# Altium PCB TSAL 2024-25.PcbDoc
Units mm, origin at the board's own origin, x right, y up, seen from the top; angles counter-clockwise.
Board outline 81.54 x 30.95 mm, 2 copper layers (Top Layer, Bottom Layer); 18 components, 10 nets, 50 pads, 1274 vias.
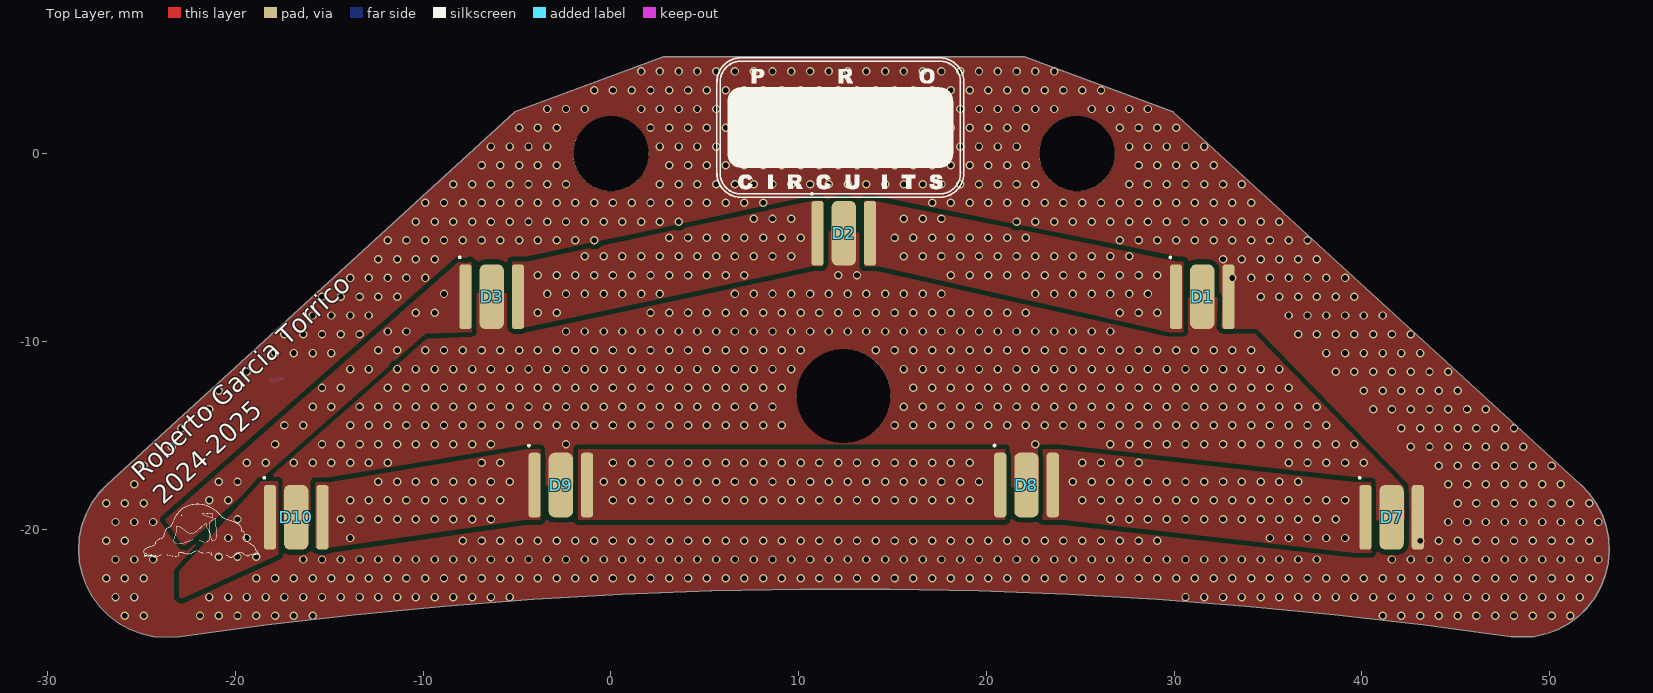
[diagram p0: Top Layer view]
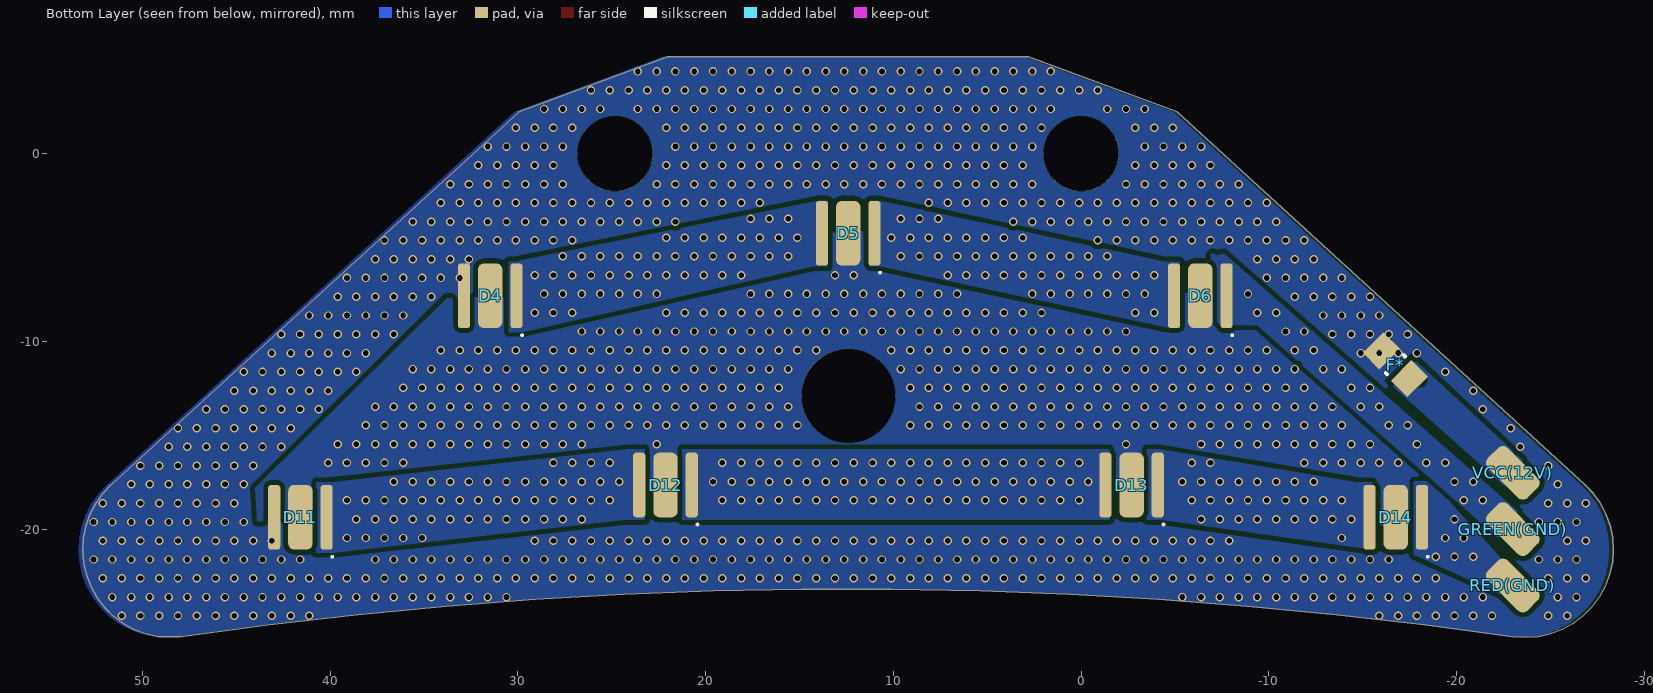
[diagram p1: Bottom Layer view, seen from below]

## Layer stack, top to bottom
Top Solder: solder mask 0.0102, Solder Resist, Dk 3.5
Top Layer: signal copper 0.0356
Dielectric 1: dielectric 0.32, FR-4, Dk 4.8
Bottom Layer: signal copper 0.0356
Bottom Solder: solder mask 0.0102, Solder Resist, Dk 3.5

## Board outline
-5.117,2.227 -26.833,-17.623 -27.28,-18.093 -27.658,-18.619 -27.96,-19.193 -28.18,-19.803 -28.313,-20.438 -28.358,-21.084 -28.31,-21.751 -28.168,-22.405 -27.934,-23.032 -27.614,-23.619 -27.213,-24.154 -26.74,-24.627 -26.205,-25.028 -25.618,-25.349 -24.991,-25.583 -24.338,-25.725 -23.671,-25.773 -23.003,-25.726 -18.298,-25.097 -13.582,-24.557 -8.856,-24.107 -4.123,-23.747 0.617,-23.476 5.361,-23.296 10.107,-23.206 14.854,-23.206 19.6,-23.296 24.344,-23.476 29.084,-23.747 33.817,-24.107 38.543,-24.557 43.259,-25.097 47.965,-25.726 49.164,-25.726 49.81,-25.586 50.43,-25.357 51.012,-25.042 51.544,-24.649 52.015,-24.185 52.417,-23.659 52.74,-23.082 52.979,-22.466 53.129,-21.822 53.186,-21.163 53.151,-20.502 53.023,-19.854 52.804,-19.229 52.501,-18.642 52.117,-18.103 51.662,-17.623 29.947,2.227 22.031,5.174 2.798,5.174

## Design rules (kind name [scope] priority, off if disabled: settings)
Clearance [All] p1: gap=0.254 ignorepadtopadclearanceinfootprint=FALSE except(0: Arc-Hole Track-Hole SMDPad-Hole THPad-Hole Via-Hole Fill-Hole Poly-Hole Region-Hole Text-Hole)
PlaneConnect [All] p1: planeconnectstyle=Direct reliefexpansion=0.508 reliefentries=4 reliefconductorwidth=0.254 reliefairgap=0.254
PolygonConnect [All] p1: connectstyle=Relief reliefconductorwidth=0.254 reliefentries=4 polygonreliefangle="90 Angle" airgapwidth=0.254
RoutingVias [All] p1: holewidth=0.711 width=1.27 viastyle="Through Hole" minholewidth=0.711 minwidth=1.27 maxholewidth=0.711 maxwidth=1.27
SolderMaskExpansion [All] p1: expansion=0.102 istentingtop=FALSE
SupplyNets "Schematic Supply Nets" [InNet('+12')] p1: voltage=0.000
Width [All] p1: maxlimit=1 minlimit=0.254 preferedwidth=0.5
29 further rules are at their usual default settings.

## Components (designator, comment, footprint, x,y, rotation, side; value= is the part's Value field where it differs from the comment)
D1 "" "LED_3535_WE - duplicate" 31.503,-7.625 r0 top
D2 "" "LED_3535_WE - duplicate" 12.41,-4.24 r0 top
D3 "" "LED_3535_WE - duplicate" -6.35,-7.62 r0 top
D4 "LEDGS-3535-85_DUPLICATE" "LED_3535_WE - duplicate" 31.48,-7.57 r0 bottom
D5 "LEDGS-3535-85_DUPLICATE" "LED_3535_WE - duplicate" 12.41,-4.24 r0 bottom
D6 "LEDGS-3535-85_DUPLICATE" "LED_3535_WE - duplicate" -6.35,-7.57 r0 bottom
D7 "LEDRS-3535-55_DUPLICATE" "LED_3535_WE - duplicate" 41.59,-19.37 r0 top
D8 "LEDRS-3535-55_DUPLICATE" "LED_3535_WE - duplicate" 22.14,-17.65 r0 top
D9 "LEDRS-3535-55_DUPLICATE" "LED_3535_WE - duplicate" -2.667,-17.653 r0 top
D10 "LEDRS-3535-55_DUPLICATE" "LED_3535_WE - duplicate" -16.764,-19.37 r0 top
D11 "LEDRS-3535-55_DUPLICATE" "LED_3535_WE - duplicate" 41.59,-19.37 r0 bottom
D12 "LEDRS-3535-55_DUPLICATE" "LED_3535_WE - duplicate" 22.14,-17.65 r0 bottom
D13 "LEDRS-3535-55_DUPLICATE" "LED_3535_WE - duplicate" -2.69,-17.65 r0 bottom
D14 "LEDRS-3535-55_DUPLICATE" "LED_3535_WE - duplicate" -16.76,-19.37 r0 bottom
F* "MFU0805FF00750P500" 0805 -16.742,-11.242 r315 bottom
GREEN(GND) "Green Led" TestPoint#1 -20.828,10.922 r90 bottom locked
RED(GND) "Red Led" TestPoint#2 -25.908,1.27 r180 bottom locked
VCC(12V) "Vcc 12V" TestPoint#3 -17.399,29.21 r90 bottom locked

## Footprints (in the part's own frame and the unit in brackets; to place one, negate y for a bottom-side part, rotate by r counter-clockwise, add the part's x,y. Pads: shape width x height; smd on the part's side, far side on the other; paste and mask are expansions set on the pad)
0805 [mm] "Chip Resistor, 2-Leads, Body 2,60x1,50mm, IPC Medium Density"
  rect 1.55x1.25 smd: 1(0,-1.05) 2(0,1.05)
  silkscreen extent -0.68,-0.05 0.68,0.05, body extent -0.75,-1.3 0.75,1.3, height 0.6
"LED_3535_WE - duplicate" [mm] "DFN, 2-Leads, Body 3,25x3,25mm, Pitch 2,28mm, IPC Medium Density"
  rrect50% 1.3x3.45 smd: 17(0,0)
  rrect50% 0.65x3.45 smd: A(1.397,0) K(-1.397,0)
  silkscreen extent -1.75,2.05 -1.65,2.15, body extent -1.73,-1.73 1.73,1.73, height 2.1
TestPoint#1 [mm]
  rrect50% 1.5x3 smd rot 135: 1(-30.922,-2.172)
TestPoint#2 [mm]
  rrect50% 1.5x3 smd rot 45: 1(-2.908,-24.27)
TestPoint#3 [mm]
  rrect50% 1.5x3 smd rot 135: 1(-46.21,-5.601)

## Part data
D1 D2 D3 D4 D5 D6: library part CMP-00150-1, "High Brightness LED, WL-SMDC Series, 525 nm, Green, 85 lm, 350 mA", Case/Package=SMD/SMT, Color=Green, Forward Current=1A, Forward Voltage=3.4V, Manufacturer="Wurth Electronics", Manufacturer Part Number=150353GS74500, Test Current=350mA, Test Temperature=25°C, Thermal Resistance of Package=8°C/W, .Creator=GP, ComponentLink1Description=http://www.farnell.com/datasheets/1886832.pdf?src-supplier=Farnell, ComponentLink1URL=http://www.farnell.com/datasheets/1886832.pdf?src-supplier=Farnell, ComponentLink2Description=http://www.farnell.com/datasheets/1886832.pdf?src-supplier=Element14, ComponentLink2URL=http://www.farnell.com/datasheets/1886832.pdf?src-supplier=Element14, ComponentLink3Description="Where buy it", ComponentLink3URL=https://www.we-online.com/catalog/en/WL-SMDC?sq=150353rs74500&sp=https%3A%2F%2Fwww.we-online.com%2Fweb%2Fen%2Fwuerth_elektronik%2Fsearchpage.php%3Fsearch%3D150353rs74500#150353GS74500, Design Item ID=LEDGS-3535-85_DUPLICATE, Luminous Flux=85lm, Max Current Rating=1A, Mount="Surface Mount", Packaging="Cut Tape", Pricing 1="1=3,24000, 50=2,85700, 100=2,34700, 500=2,08000 (USD)", REACH SVHC=Unknown, RoHS=Yes, RoHS Compliant=Yes, Source=Semiconductor.SchLib, Viewing Angle=125°, Wavelength=525nm
D7 D8 D9 D10 D11 D12 D13 D14: library part CMP-00152-1, "High Brightness Led, Wl-Smdc Series, 625 Nm, Red, 55 Lm, 350 Ma", Case/Package=SMD/SMT, Color=Red, Forward Current=700mA, Forward Voltage=2.2V, Manufacturer="Wurth Electronics", Manufacturer Part Number=150353RS74500, Test Current=350mA, Test Temperature=25°C, Thermal Resistance of Package=10°C/W, .Creator=GP, ComponentLink1Description=http://www.farnell.com/datasheets/1886833.pdf?src-supplier=Farnell, ComponentLink1URL=http://www.farnell.com/datasheets/1886833.pdf?src-supplier=Farnell, ComponentLink2Description=http://www.farnell.com/datasheets/1886833.pdf?src-supplier=Element14, ComponentLink2URL=http://www.farnell.com/datasheets/1886833.pdf?src-supplier=Element14, ComponentLink3Description="Where buy it", ComponentLink3URL=https://www.we-online.com/catalog/en/WL-SMDC?sq=150353rs74500&sp=https%3A%2F%2Fwww.we-online.com%2Fweb%2Fen%2Fwuerth_elektronik%2Fsearchpage.php%3Fsearch%3D150353rs74500#150353RS74500, Design Item ID=LEDRS-3535-55_DUPLICATE, Luminous Flux=55lm, Max Current Rating=700mA, Mount="Surface Mount", Packaging="Cut Tape", Pricing 1="5=1,40500 (USD)", REACH SVHC=Unknown, RoHS=Yes, RoHS Compliant=Yes, Source=Semiconductor.SchLib, Stock 1=1, Viewing Angle=125°, Wavelength=625nm
F*: library part CMP-005-00000-3, "Electric Fuse, Very Fast Blow, 0.75A, 32VDC, 50A (IR), Surface Mount", Current Rating=750mA, Max Operating Temperature=125°C, Min Operating Temperature=-55°C, Mounting Technology="Surface Mount", RoHS Compliant=Yes
GREEN(GND) RED(GND) VCC(12V): library part CMP-00042-2, "Test Point 1x1 mm", .Creator=GP, .PCBcheck=GP, .SCHcheck=GP, Category=TestPoint, Design Item ID=TestPoint, Source=e-Tech_Racing.SchLib

## Free pads (board coordinates)
  round 4 hole 4: 1(0,0) 1(24.829,0)
  round 5 hole 5: 1(12.4,-12.9)

## Via types
v1: diameter 0.45, hole 0.3, Top Layer to Bottom Layer, tented both sides, 1274 vias

## Nets (pads, with @x,y where several pads share a name; then routed paths per layer and width w, separated by ;. In a path a pad name is that pad's centre, name@x,y a point inside that pad or via, vN(x,y) a via of type N, cw(c..) or ccw(c..) an arc to the next point about the centre after c; other vN are vias at no path point)
+12: F*.2 VCC(12V).1 | length 0.6
  Bottom Layer w0.254: F*.2@-18.087,-12.087 F*.2
G1: D1.K D2.A D4.K D5.A
  other v1: 27.11,-8.472 28.11,-8.472 29.11,-8.472 22.61,-7.472 23.61,-7.472 24.61,-7.472 25.61,-7.472 26.61,-7.472 27.61,-7.472 28.61,-7.472 18.11,-6.472 19.11,-6.472 20.11,-6.472 21.11,-6.472 22.11,-6.472 23.11,-6.472 24.11,-6.472 25.11,-6.472 26.11,-6.472 27.11,-6.472 28.11,-6.472 29.11,-6.472 15.61,-5.472 16.61,-5.472 17.61,-5.472 18.61,-5.472 19.61,-5.472 20.61,-5.472 21.61,-5.472 22.61,-5.472 23.61,-5.472 24.61,-5.472 25.61,-5.472 26.61,-5.472 27.61,-5.472 15.11,-4.472 16.11,-4.472 17.11,-4.472 18.11,-4.472 19.11,-4.472 20.11,-4.472 21.11,-4.472 22.11,-4.472 15.61,-3.472 16.61,-3.472 17.61,-3.472
G2: D2.K D3.A D5.K D6.A
  other v1: -3.89,-8.472 -2.89,-8.472 -3.39,-7.472 -2.39,-7.472 -1.39,-7.472 -0.39,-7.472 0.61,-7.472 1.61,-7.472 2.61,-7.472 -3.89,-6.472 -2.89,-6.472 -1.89,-6.472 -0.89,-6.472 0.11,-6.472 1.11,-6.472 2.11,-6.472 3.11,-6.472 4.11,-6.472 5.11,-6.472 6.11,-6.472 7.11,-6.472 -1.39,-5.472 -0.39,-5.472 0.61,-5.472 1.61,-5.472 2.61,-5.472 3.61,-5.472 4.61,-5.472 5.61,-5.472 6.61,-5.472 7.61,-5.472 8.61,-5.472 9.61,-5.472 3.11,-4.472 4.11,-4.472 5.11,-4.472 6.11,-4.472 7.11,-4.472 8.11,-4.472 9.11,-4.472 10.11,-4.472 7.61,-3.472 8.61,-3.472 9.61,-3.472
NetD1_A: D1.A D4.A D7.A D11.A F*.1 pad.1@0,0 pad.1@24.829,0
  other v1: -25.89,-24.619 -24.89,-24.619 -21.89,-24.619 -20.89,-24.619 -19.89,-24.619 -18.89,-24.619 -17.89,-24.619 -16.89,-24.619 -15.89,-24.619 41.11,-24.619 42.11,-24.619 43.11,-24.619 44.11,-24.619 45.11,-24.619 46.11,-24.619 47.11,-24.619 48.11,-24.619 49.11,-24.619 50.11,-24.619 51.11,-24.619 -26.39,-23.619 -25.39,-23.619 -21.39,-23.619 -20.39,-23.619 -19.39,-23.619 -18.39,-23.619 -17.39,-23.619 -16.39,-23.619 -15.39,-23.619 -14.39,-23.619 -13.39,-23.619 -12.39,-23.619 -11.39,-23.619 -10.39,-23.619 -9.39,-23.619 -8.39,-23.619 -7.39,-23.619 -6.39,-23.619 -5.39,-23.619 30.61,-23.619 31.61,-23.619 32.61,-23.619 33.61,-23.619 34.61,-23.619 35.61,-23.619 36.61,-23.619 37.61,-23.619 38.61,-23.619 39.61,-23.619 40.61,-23.619 41.61,-23.619 42.61,-23.619 43.61,-23.619 44.61,-23.619 45.61,-23.619 46.61,-23.619 47.61,-23.619 48.61,-23.619 49.61,-23.619 50.61,-23.619 51.61,-23.619 -26.89,-22.619 -25.89,-22.619 -24.89,-22.619 -18.89,-22.619 -17.89,-22.619 -16.89,-22.619 -15.89,-22.619 -14.89,-22.619 -13.89,-22.619 -12.89,-22.619 -11.89,-22.619 -10.89,-22.619 -9.89,-22.619 -8.89,-22.619 -7.89,-22.619 -6.89,-22.619 -5.89,-22.619 -4.89,-22.619 -3.89,-22.619 -2.89,-22.619 -1.89,-22.619 -0.89,-22.619 0.11,-22.619 1.11,-22.619 2.11,-22.619 3.11,-22.619 4.11,-22.619 5.11,-22.619 6.11,-22.619 7.11,-22.619 8.11,-22.619 9.11,-22.619 10.11,-22.619 11.11,-22.619 12.11,-22.619 13.11,-22.619 14.11,-22.619 15.11,-22.619 16.11,-22.619 17.11,-22.619 18.11,-22.619 19.11,-22.619 20.11,-22.619 21.11,-22.619 22.11,-22.619 23.11,-22.619 24.11,-22.619 25.11,-22.619 26.11,-22.619 27.11,-22.619 28.11,-22.619 29.11,-22.619 30.11,-22.619 31.11,-22.619 32.11,-22.619 33.11,-22.619 34.11,-22.619 35.11,-22.619 36.11,-22.619 37.11,-22.619 38.11,-22.619 39.11,-22.619 40.11,-22.619 41.11,-22.619 42.11,-22.619 43.11,-22.619 44.11,-22.619 45.11,-22.619 46.11,-22.619 47.11,-22.619 48.11,-22.619 49.11,-22.619 50.11,-22.619 51.11,-22.619 52.11,-22.619 -26.39,-21.619 -25.39,-21.619 -24.39,-21.619 -16.39,-21.619 -15.39,-21.619 -14.39,-21.619 -13.39,-21.619 -12.39,-21.619 -11.39,-21.619 -10.39,-21.619 -9.39,-21.619 -8.39,-21.619 -7.39,-21.619 -6.39,-21.619 -5.39,-21.619 -4.39,-21.619 -3.39,-21.619 -2.39,-21.619 -1.39,-21.619 -0.39,-21.619 0.61,-21.619 1.61,-21.619 2.61,-21.619 3.61,-21.619 4.61,-21.619 5.61,-21.619 6.61,-21.619 7.61,-21.619 8.61,-21.619 9.61,-21.619 10.61,-21.619 11.61,-21.619 12.61,-21.619 13.61,-21.619 14.61,-21.619 15.61,-21.619 16.61,-21.619 17.61,-21.619 18.61,-21.619 19.61,-21.619 20.61,-21.619 21.61,-21.619 22.61,-21.619 23.61,-21.619 24.61,-21.619 25.61,-21.619 26.61,-21.619 27.61,-21.619 28.61,-21.619 29.61,-21.619 30.61,-21.619 31.61,-21.619 32.61,-21.619 33.61,-21.619 34.61,-21.619 35.61,-21.619 36.61,-21.619 37.61,-21.619 41.61,-21.619 42.61,-21.619 43.61,-21.619 44.61,-21.619 45.61,-21.619 46.61,-21.619 47.61,-21.619 48.61,-21.619 49.61,-21.619 50.61,-21.619 51.61,-21.619 52.61,-21.619 -26.89,-20.619 -25.89,-20.619 -7.89,-20.619 -6.89,-20.619 -5.89,-20.619 -4.89,-20.619 -3.89,-20.619 -2.89,-20.619 -1.89,-20.619 -0.89,-20.619 0.11,-20.619 1.11,-20.619 2.11,-20.619 3.11,-20.619 4.11,-20.619 5.11,-20.619 6.11,-20.619 7.11,-20.619 8.11,-20.619 9.11,-20.619 10.11,-20.619 11.11,-20.619 12.11,-20.619 13.11,-20.619 14.11,-20.619 15.11,-20.619 16.11,-20.619 17.11,-20.619 18.11,-20.619 19.11,-20.619 20.11,-20.619 21.11,-20.619 22.11,-20.619 23.11,-20.619 24.11,-20.619 25.11,-20.619 26.11,-20.619 27.11,-20.619 28.11,-20.619 29.11,-20.619 43.11,-20.619 44.11,-20.619 45.11,-20.619 46.11,-20.619 47.11,-20.619 48.11,-20.619 49.11,-20.619 50.11,-20.619 51.11,-20.619 52.11,-20.619 -26.39,-19.619 -25.39,-19.619 -24.39,-19.619 44.61,-19.619 45.61,-19.619 46.61,-19.619 47.61,-19.619 48.61,-19.619 49.61,-19.619 50.61,-19.619 51.61,-19.619 52.61,-19.619 -26.89,-18.619 -25.89,-18.619 -24.89,-18.619 45.11,-18.619 46.11,-18.619 47.11,-18.619 48.11,-18.619 49.11,-18.619 50.11,-18.619 51.11,-18.619 52.11,-18.619 -25.39,-17.619 44.61,-17.619 45.61,-17.619 46.61,-17.619 47.61,-17.619 48.61,-17.619 49.61,-17.619 50.61,-17.619 -24.89,-16.619 44.11,-16.619 45.11,-16.619 46.11,-16.619 47.11,-16.619 48.11,-16.619 49.11,-16.619 50.11,-16.619 -23.39,-15.619 42.61,-15.619 43.61,-15.619 44.61,-15.619 45.61,-15.619 46.61,-15.619 47.61,-15.619 48.61,-15.619 -22.89,-14.619 42.11,-14.619 43.11,-14.619 44.11,-14.619 45.11,-14.619 46.11,-14.619 47.11,-14.619 48.11,-14.619 -21.39,-13.619 40.61,-13.619 41.61,-13.619 42.61,-13.619 43.61,-13.619 44.61,-13.619 45.61,-13.619 46.61,-13.619 -20.89,-12.619 40.11,-12.619 41.11,-12.619 42.11,-12.619 43.11,-12.619 44.11,-12.619 45.11,-12.619 -19.39,-11.619 38.61,-11.619 39.61,-11.619 40.61,-11.619 41.61,-11.619 42.61,-11.619 43.61,-11.619 44.61,-11.619 -17.89,-10.619 -16.89,-10.619 -15.89,-10.619 -14.89,-10.619 38.11,-10.619 39.11,-10.619 40.11,-10.619 41.11,-10.619 42.11,-10.619 43.11,-10.619 -17.39,-9.619 -16.39,-9.619 -15.39,-9.619 -14.39,-9.619 -13.39,-9.619 36.61,-9.619 37.61,-9.619 38.61,-9.619 39.61,-9.619 40.61,-9.619 41.61,-9.619 42.61,-9.619 -15.89,-8.619 -14.89,-8.619 -13.89,-8.619 -12.89,-8.619 36.11,-8.619 37.11,-8.619 38.11,-8.619 39.11,-8.619 40.11,-8.619 41.11,-8.619 -15.39,-7.619 -14.39,-7.619 -13.39,-7.619 -12.39,-7.619 -11.39,-7.619 34.61,-7.619 35.61,-7.619 36.61,-7.619 37.61,-7.619 38.61,-7.619 39.61,-7.619 -13.89,-6.619 -12.89,-6.619 -11.89,-6.619 -10.89,-6.619 -9.89,-6.619 33.11,-6.619 34.11,-6.619 35.11,-6.619 36.11,-6.619 37.11,-6.619 38.11,-6.619 39.11,-6.619 -12.39,-5.619 -11.39,-5.619 -10.39,-5.619 -9.39,-5.619 32.61,-5.619 33.61,-5.619 34.61,-5.619 35.61,-5.619 36.61,-5.619 37.61,-5.619 -11.89,-4.619 -10.89,-4.619 -9.89,-4.619 -8.89,-4.619 -7.89,-4.619 -6.89,-4.619 -5.89,-4.619 -4.89,-4.619 -3.89,-4.619 -2.89,-4.619 -1.89,-4.619 -0.89,-4.619 27.11,-4.619 28.11,-4.619 29.11,-4.619 30.11,-4.619 31.11,-4.619 32.11,-4.619 33.11,-4.619 34.11,-4.619 35.11,-4.619 36.11,-4.619 37.11,-4.619 -10.39,-3.619 -9.39,-3.619 -8.39,-3.619 -7.39,-3.619 -6.39,-3.619 -5.39,-3.619 -4.39,-3.619 -3.39,-3.619 -2.39,-3.619 -1.39,-3.619 -0.39,-3.619 0.61,-3.619 1.61,-3.619 2.61,-3.619 3.61,-3.619 21.61,-3.619 22.61,-3.619 23.61,-3.619 24.61,-3.619 25.61,-3.619 26.61,-3.619 27.61,-3.619 28.61,-3.619 29.61,-3.619 30.61,-3.619 31.61,-3.619 32.61,-3.619 33.61,-3.619 34.61,-3.619 35.61,-3.619 -9.89,-2.619 -8.89,-2.619 -7.89,-2.619 -6.89,-2.619 -5.89,-2.619 -4.89,-2.619 -3.89,-2.619 -2.89,-2.619 -1.89,-2.619 -0.89,-2.619 0.11,-2.619 1.11,-2.619 2.11,-2.619 3.11,-2.619 4.11,-2.619 5.11,-2.619 6.11,-2.619 7.11,-2.619 8.11,-2.619 17.11,-2.619 18.11,-2.619 19.11,-2.619 20.11,-2.619 21.11,-2.619 22.11,-2.619 23.11,-2.619 24.11,-2.619 25.11,-2.619 26.11,-2.619 27.11,-2.619 28.11,-2.619 29.11,-2.619 30.11,-2.619 31.11,-2.619 32.11,-2.619 33.11,-2.619 34.11,-2.619 -8.39,-1.619 -7.39,-1.619 -6.39,-1.619 -5.39,-1.619 -4.39,-1.619 -3.39,-1.619 -2.39,-1.619 2.61,-1.619 3.61,-1.619 4.61,-1.619 5.61,-1.619 6.61,-1.619 7.61,-1.619 8.61,-1.619 9.61,-1.619 10.61,-1.619 11.61,-1.619 12.61,-1.619 13.61,-1.619 14.61,-1.619 15.61,-1.619 16.61,-1.619 17.61,-1.619 18.61,-1.619 19.61,-1.619 20.61,-1.619 21.61,-1.619 22.61,-1.619 27.61,-1.619 28.61,-1.619 29.61,-1.619 30.61,-1.619 31.61,-1.619 32.61,-1.619 33.61,-1.619 -6.89,-0.619 -5.89,-0.619 -4.89,-0.619 -3.89,-0.619 -2.89,-0.619 3.11,-0.619 4.11,-0.619 5.11,-0.619 6.11,-0.619 7.11,-0.619 8.11,-0.619 9.11,-0.619 10.11,-0.619 11.11,-0.619 12.11,-0.619 13.11,-0.619 14.11,-0.619 15.11,-0.619 16.11,-0.619 17.11,-0.619 18.11,-0.619 19.11,-0.619 20.11,-0.619 21.11,-0.619 22.11,-0.619 28.11,-0.619 29.11,-0.619 30.11,-0.619 31.11,-0.619 32.11,-0.619 -6.39,0.381 -5.39,0.381 -4.39,0.381 -3.39,0.381 2.61,0.381 3.61,0.381 4.61,0.381 5.61,0.381 6.61,0.381 7.61,0.381 8.61,0.381 9.61,0.381 10.61,0.381 11.61,0.381 12.61,0.381 13.61,0.381 14.61,0.381 15.61,0.381 16.61,0.381 17.61,0.381 18.61,0.381 19.61,0.381 20.61,0.381 21.61,0.381 27.61,0.381 28.61,0.381 29.61,0.381 30.61,0.381 31.61,0.381 -4.89,1.381 -3.89,1.381 -2.89,1.381 2.11,1.381 3.11,1.381 4.11,1.381 5.11,1.381 6.11,1.381 7.11,1.381 8.11,1.381 9.11,1.381 10.11,1.381 11.11,1.381 12.11,1.381 13.11,1.381 14.11,1.381 15.11,1.381 16.11,1.381 17.11,1.381 18.11,1.381 19.11,1.381 20.11,1.381 21.11,1.381 22.11,1.381 27.11,1.381 28.11,1.381 29.11,1.381 30.11,1.381 -3.39,2.381 -2.39,2.381 -1.39,2.381 1.61,2.381 2.61,2.381 3.61,2.381 4.61,2.381 5.61,2.381 6.61,2.381 7.61,2.381 8.61,2.381 9.61,2.381 10.61,2.381 11.61,2.381 12.61,2.381 13.61,2.381 14.61,2.381 15.61,2.381 16.61,2.381 17.61,2.381 18.61,2.381 19.61,2.381 20.61,2.381 21.61,2.381 22.61,2.381 23.61,2.381 25.61,2.381 26.61,2.381 27.61,2.381 28.61,2.381 -0.89,3.381 0.11,3.381 1.11,3.381 2.11,3.381 3.11,3.381 4.11,3.381 5.11,3.381 6.11,3.381 7.11,3.381 8.11,3.381 9.11,3.381 10.11,3.381 11.11,3.381 12.11,3.381 13.11,3.381 14.11,3.381 15.11,3.381 16.11,3.381 17.11,3.381 18.11,3.381 19.11,3.381 20.11,3.381 21.11,3.381 22.11,3.381 23.11,3.381 24.11,3.381 25.11,3.381 26.11,3.381 1.61,4.381 2.61,4.381 3.61,4.381 4.61,4.381 5.61,4.381 6.61,4.381 7.61,4.381 8.61,4.381 9.61,4.381 10.61,4.381 11.61,4.381 12.61,4.381 13.61,4.381 14.61,4.381 15.61,4.381 16.61,4.381 17.61,4.381 18.61,4.381 19.61,4.381 20.61,4.381 21.61,4.381 22.61,4.381 23.61,4.381
NetD3_K: D3.K D6.K GREEN(GND).1
  other v1: -21.39,-18.472 -20.39,-18.472 -20.89,-17.472 -19.89,-17.472 -19.39,-16.472 -18.39,-16.472 -17.89,-15.472 -17.39,-14.472 -16.39,-14.472 -15.89,-13.472 -14.89,-13.472 -15.39,-12.472 -14.39,-12.472 -13.89,-11.472 -12.89,-11.472 -12.39,-10.472 -11.39,-10.472 -11.89,-9.472 -10.89,-9.472 -10.39,-8.472 -9.39,-8.472 -8.89,-7.472
NetD10_K: D10.K D14.K RED(GND).1
  other v1: -20.89,-21.472 -19.89,-21.472 -18.89,-21.472 -20.39,-20.472 -19.39,-20.472 -19.89,-19.472
R1: D7.K D8.A D11.K D12.A
  other v1: 35.11,-20.472 36.11,-20.472 37.11,-20.472 38.11,-20.472 39.11,-20.472 26.61,-19.472 27.61,-19.472 28.61,-19.472 29.61,-19.472 30.61,-19.472 31.61,-19.472 32.61,-19.472 33.61,-19.472 34.61,-19.472 35.61,-19.472 36.61,-19.472 37.61,-19.472 38.61,-19.472 25.11,-18.472 26.11,-18.472 27.11,-18.472 28.11,-18.472 29.11,-18.472 30.11,-18.472 31.11,-18.472 32.11,-18.472 33.11,-18.472 34.11,-18.472 35.11,-18.472 36.11,-18.472 37.11,-18.472 38.11,-18.472 39.11,-18.472 24.61,-17.472 25.61,-17.472 26.61,-17.472 27.61,-17.472 28.61,-17.472 29.61,-17.472 30.61,-17.472 31.61,-17.472 32.61,-17.472 33.61,-17.472 34.61,-17.472 35.61,-17.472 36.61,-17.472 25.11,-16.472 26.11,-16.472 27.11,-16.472 28.11,-16.472
R2: D8.K D9.A D12.K D13.A
  other v1: 0.11,-18.472 1.11,-18.472 2.11,-18.472 3.11,-18.472 4.11,-18.472 5.11,-18.472 6.11,-18.472 7.11,-18.472 8.11,-18.472 9.11,-18.472 10.11,-18.472 11.11,-18.472 12.11,-18.472 13.11,-18.472 14.11,-18.472 15.11,-18.472 16.11,-18.472 17.11,-18.472 18.11,-18.472 19.11,-18.472 -0.39,-17.472 0.61,-17.472 1.61,-17.472 2.61,-17.472 3.61,-17.472 4.61,-17.472 5.61,-17.472 6.61,-17.472 7.61,-17.472 8.61,-17.472 9.61,-17.472 10.61,-17.472 11.61,-17.472 12.61,-17.472 13.61,-17.472 14.61,-17.472 15.61,-17.472 16.61,-17.472 17.61,-17.472 18.61,-17.472 19.61,-17.472 0.11,-16.472 1.11,-16.472 2.11,-16.472 3.11,-16.472 4.11,-16.472 5.11,-16.472 6.11,-16.472 7.11,-16.472 8.11,-16.472 9.11,-16.472 10.11,-16.472 11.11,-16.472 12.11,-16.472 13.11,-16.472 14.11,-16.472 15.11,-16.472 16.11,-16.472 17.11,-16.472 18.11,-16.472 19.11,-16.472
R3: D9.K D10.A D13.K D14.A
  other v1: -13.89,-20.472 -14.39,-19.472 -13.39,-19.472 -12.39,-19.472 -11.39,-19.472 -10.39,-19.472 -9.39,-19.472 -8.39,-19.472 -7.39,-19.472 -6.39,-19.472 -13.89,-18.472 -12.89,-18.472 -11.89,-18.472 -10.89,-18.472 -9.89,-18.472 -8.89,-18.472 -7.89,-18.472 -6.89,-18.472 -5.89,-18.472 -12.39,-17.472 -11.39,-17.472 -10.39,-17.472 -9.39,-17.472 -8.39,-17.472 -7.39,-17.472 -6.39,-17.472 -5.39,-17.472 -6.89,-16.472 -5.89,-16.472
Thermal: D1.17 D2.17 D3.17 D4.17 D5.17 D6.17 D7.17 D8.17 D9.17 D10.17 D11.17 D12.17 D13.17 D14.17 pad.1@12.4,-12.9
  other v1: -16.89,-16.472 -15.89,-16.472 -14.89,-16.472 -13.89,-16.472 -12.89,-16.472 -11.89,-16.472 36.11,-16.472 37.11,-16.472 38.11,-16.472 39.11,-16.472 40.11,-16.472 -15.39,-15.472 -14.39,-15.472 -13.39,-15.472 -12.39,-15.472 -11.39,-15.472 -10.39,-15.472 -9.39,-15.472 -8.39,-15.472 -7.39,-15.472 -6.39,-15.472 -2.39,-15.472 22.61,-15.472 26.61,-15.472 27.61,-15.472 28.61,-15.472 29.61,-15.472 30.61,-15.472 31.61,-15.472 32.61,-15.472 33.61,-15.472 34.61,-15.472 35.61,-15.472 36.61,-15.472 37.61,-15.472 38.61,-15.472 39.61,-15.472 -13.89,-14.472 -12.89,-14.472 -11.89,-14.472 -10.89,-14.472 -9.89,-14.472 -8.89,-14.472 -7.89,-14.472 -6.89,-14.472 -5.89,-14.472 -4.89,-14.472 -3.89,-14.472 -2.89,-14.472 -1.89,-14.472 -0.89,-14.472 0.11,-14.472 1.11,-14.472 2.11,-14.472 3.11,-14.472 4.11,-14.472 5.11,-14.472 6.11,-14.472 7.11,-14.472 8.11,-14.472 9.11,-14.472 15.11,-14.472 16.11,-14.472 17.11,-14.472 18.11,-14.472 19.11,-14.472 20.11,-14.472 21.11,-14.472 22.11,-14.472 23.11,-14.472 24.11,-14.472 25.11,-14.472 26.11,-14.472 27.11,-14.472 28.11,-14.472 29.11,-14.472 30.11,-14.472 31.11,-14.472 32.11,-14.472 33.11,-14.472 34.11,-14.472 35.11,-14.472 36.11,-14.472 37.11,-14.472 38.11,-14.472 -13.39,-13.472 -12.39,-13.472 -11.39,-13.472 -10.39,-13.472 -9.39,-13.472 -8.39,-13.472 -7.39,-13.472 -6.39,-13.472 -5.39,-13.472 -4.39,-13.472 -3.39,-13.472 -2.39,-13.472 -1.39,-13.472 -0.39,-13.472 0.61,-13.472 1.61,-13.472 2.61,-13.472 3.61,-13.472 4.61,-13.472 5.61,-13.472 6.61,-13.472 7.61,-13.472 8.61,-13.472 15.61,-13.472 16.61,-13.472 17.61,-13.472 18.61,-13.472 19.61,-13.472 20.61,-13.472 21.61,-13.472 22.61,-13.472 23.61,-13.472 24.61,-13.472 25.61,-13.472 26.61,-13.472 27.61,-13.472 28.61,-13.472 29.61,-13.472 30.61,-13.472 31.61,-13.472 32.61,-13.472 33.61,-13.472 34.61,-13.472 35.61,-13.472 36.61,-13.472 37.61,-13.472 -11.89,-12.472 -10.89,-12.472 -9.89,-12.472 -8.89,-12.472 -7.89,-12.472 -6.89,-12.472 -5.89,-12.472 -4.89,-12.472 -3.89,-12.472 -2.89,-12.472 -1.89,-12.472 -0.89,-12.472 0.11,-12.472 1.11,-12.472 2.11,-12.472 3.11,-12.472 4.11,-12.472 5.11,-12.472 6.11,-12.472 7.11,-12.472 8.11,-12.472 9.11,-12.472 16.11,-12.472 17.11,-12.472 18.11,-12.472 19.11,-12.472 20.11,-12.472 21.11,-12.472 22.11,-12.472 23.11,-12.472 24.11,-12.472 25.11,-12.472 26.11,-12.472 27.11,-12.472 28.11,-12.472 29.11,-12.472 30.11,-12.472 31.11,-12.472 32.11,-12.472 33.11,-12.472 34.11,-12.472 35.11,-12.472 36.11,-12.472 -11.39,-11.472 -10.39,-11.472 -9.39,-11.472 -8.39,-11.472 -7.39,-11.472 -6.39,-11.472 -5.39,-11.472 -4.39,-11.472 -3.39,-11.472 -2.39,-11.472 -1.39,-11.472 -0.39,-11.472 0.61,-11.472 1.61,-11.472 2.61,-11.472 3.61,-11.472 4.61,-11.472 5.61,-11.472 6.61,-11.472 7.61,-11.472 8.61,-11.472 9.61,-11.472 15.61,-11.472 16.61,-11.472 17.61,-11.472 18.61,-11.472 19.61,-11.472 20.61,-11.472 21.61,-11.472 22.61,-11.472 23.61,-11.472 24.61,-11.472 25.61,-11.472 26.61,-11.472 27.61,-11.472 28.61,-11.472 29.61,-11.472 30.61,-11.472 31.61,-11.472 32.61,-11.472 33.61,-11.472 34.61,-11.472 35.61,-11.472 -9.89,-10.472 -8.89,-10.472 -7.89,-10.472 -6.89,-10.472 -5.89,-10.472 -4.89,-10.472 -3.89,-10.472 -2.89,-10.472 -1.89,-10.472 -0.89,-10.472 0.11,-10.472 1.11,-10.472 2.11,-10.472 3.11,-10.472 4.11,-10.472 5.11,-10.472 6.11,-10.472 7.11,-10.472 8.11,-10.472 9.11,-10.472 10.11,-10.472 14.11,-10.472 15.11,-10.472 16.11,-10.472 17.11,-10.472 18.11,-10.472 19.11,-10.472 20.11,-10.472 21.11,-10.472 22.11,-10.472 23.11,-10.472 24.11,-10.472 25.11,-10.472 26.11,-10.472 27.11,-10.472 28.11,-10.472 29.11,-10.472 30.11,-10.472 31.11,-10.472 32.11,-10.472 33.11,-10.472 34.11,-10.472 -2.39,-9.472 -1.39,-9.472 -0.39,-9.472 0.61,-9.472 1.61,-9.472 2.61,-9.472 3.61,-9.472 4.61,-9.472 5.61,-9.472 6.61,-9.472 7.61,-9.472 8.61,-9.472 9.61,-9.472 10.61,-9.472 11.61,-9.472 12.61,-9.472 13.61,-9.472 14.61,-9.472 15.61,-9.472 16.61,-9.472 17.61,-9.472 18.61,-9.472 19.61,-9.472 20.61,-9.472 21.61,-9.472 22.61,-9.472 23.61,-9.472 24.61,-9.472 25.61,-9.472 26.61,-9.472 2.11,-8.472 3.11,-8.472 4.11,-8.472 5.11,-8.472 6.11,-8.472 7.11,-8.472 8.11,-8.472 9.11,-8.472 10.11,-8.472 11.11,-8.472 12.11,-8.472 13.11,-8.472 14.11,-8.472 15.11,-8.472 16.11,-8.472 17.11,-8.472 18.11,-8.472 19.11,-8.472 20.11,-8.472 21.11,-8.472 22.11,-8.472 6.61,-7.472 7.61,-7.472 8.61,-7.472 9.61,-7.472 10.61,-7.472 11.61,-7.472 12.61,-7.472 13.61,-7.472 14.61,-7.472 15.61,-7.472 16.61,-7.472 17.61,-7.472 12.11,-6.472 13.11,-6.472

## Polygon pours and split planes (outlines as drawn)
NetD10_K on Top Layer "NETD10_K_L01_P037" (solid, pour order 37): -23,-22.25 -18.638,-17.461 -17.739,-17.461 -17.73,-17.461 -17.73,-21.372 -23,-23.75
NetD3_K on Top Layer "NETD3_K_L01_P040" (solid, pour order 40): -7.747,-5.837 -8.1,-5.75 -23.75,-19.497 -22.75,-20.933 -9.9,-9.6 -7.4,-9.5 -7.4,-5.719
NetD1_A on Top Layer "NETD1_A_L01_P048" (solid, pour order 48): -26.205,-25.028 -25.618,-25.349 -24.991,-25.583 -24.338,-25.725 -23.671,-25.773 -23.003,-25.726 -18.298,-25.097 -13.582,-24.557 -8.856,-24.107 -4.123,-23.747 0.617,-23.476 5.361,-23.296 10.107,-23.206 14.854,-23.206 19.6,-23.296 24.344,-23.476 29.084,-23.747 33.817,-24.107 38.543,-24.557 43.259,-25.097 47.965,-25.726 49.164,-25.726 49.81,-25.586 50.43,-25.357 51.012,-25.042 51.544,-24.649 52.015,-24.185 52.417,-23.659 52.74,-23.082 52.979,-22.466 53.129,-21.822 53.186,-21.163 53.151,-20.502 53.023,-19.854 52.804,-19.229 52.501,-18.642 52.117,-18.103 51.662,-17.623 29.947,2.227 22.031,5.174 2.798,5.174 -5.117,2.227 -26.833,-17.623 -27.28,-18.093 -27.658,-18.619 -27.96,-19.193 -28.18,-19.803 -28.313,-20.438 -28.358,-21.084 -28.31,-21.751 -28.168,-22.405 -27.934,-23.032 -27.614,-23.619 -27.213,-24.154 -26.74,-24.627
Thermal on Top Layer "THERMAL_L01_P047" (solid, pour order 47): 33.8,-7.7 29.47,-7.57 13.807,-4.24 10.2,-4 -4.366,-7.443 -8.334,-7.443 -19.043,-16.3 -19.3,-19.856 -15.125,-19.8 -4.718,-17.65 24.124,-17.777 39.606,-19.497 43.9,-19.6 44,-17.807
G1 on Top Layer "G1_L01_P038" (solid, pour order 38): 30.25,-5.75 14,-2.5 13.5,-2.5 13.5,-6 14.25,-6 29.75,-9.5 30.5,-9.5 30.5,-5.75
NetD1_A on Top Layer "NETD1_A_L01_P036" (solid, pour order 36): 32.7,-5.9 33.3,-5.9 43.9,-16.8 43.9,-21.123 42.6,-21.123 42.5,-17.645 34.397,-9.324 32.5,-9.324
R3 on Top Layer "R3_L01_P042" (solid, pour order 42): -15.75,-21 -15,-21 -4.5,-19.5 -3.75,-19.5 -3.75,-15.75 -4.5,-15.75 -15,-17.5 -15.75,-17.5
R1 on Top Layer "R1_L01_P046" (solid, pour order 46): 24,-15.75 39.75,-17.5 40.5,-17.5 40.5,-21.25 39.5,-21.25 24,-19.5 23,-19.5 23,-15.75
R2 on Top Layer "R2_L01_P044" (solid, pour order 44): -1.75,-15.75 21,-15.75 21,-19.5 -1.75,-19.5
G2 on Top Layer "G2_L01_P039" (solid, pour order 39): 11.25,-2.5 10.75,-2.5 -4.5,-5.75 -5.25,-5.75 -5.25,-9.25 -4.5,-9.25 10.75,-6 11.25,-6
NetD10_K on Bottom Layer "NETD10_K_L02_P045" (solid, pour order 45): -23,-22.25 -18.638,-17.461 -17.739,-17.461 -17.73,-17.461 -17.73,-21.372 -23,-23.75
NetD3_K on Bottom Layer "NETD3_K_L02_P043" (solid, pour order 43): -7.247,-5.399 -7.6,-5.313 -23.25,-19.059 -22.25,-20.495 -9.4,-9.163 -6.9,-9.062 -6.9,-5.282
NetD1_A on Bottom Layer "NETD1_A_L02_P050" (solid, pour order 50): -25.983,-25.028 -25.396,-25.349 -24.769,-25.583 -24.116,-25.725 -23.449,-25.773 -22.781,-25.726 -18.076,-25.097 -13.36,-24.557 -8.634,-24.107 -3.901,-23.747 0.839,-23.476 5.583,-23.296 10.329,-23.206 15.076,-23.206 19.822,-23.296 24.566,-23.476 29.306,-23.747 34.039,-24.107 38.765,-24.557 43.481,-25.097 48.187,-25.726 49.386,-25.726 50.032,-25.586 50.652,-25.357 51.234,-25.042 51.766,-24.649 52.237,-24.185 52.639,-23.659 52.962,-23.082 53.201,-22.466 53.351,-21.822 53.408,-21.163 53.373,-20.502 53.245,-19.854 53.026,-19.229 52.723,-18.642 52.339,-18.103 51.884,-17.623 30.169,2.227 22.253,5.174 3.02,5.174 -4.895,2.227 -26.611,-17.623 -27.058,-18.093 -27.436,-18.619 -27.738,-19.193 -27.958,-19.803 -28.091,-20.438 -28.136,-21.084 -28.088,-21.751 -27.946,-22.405 -27.712,-23.032 -27.392,-23.619 -26.991,-24.154 -26.518,-24.627
Thermal on Bottom Layer "THERMAL_L02_P049" (solid, pour order 49): 33.8,-7.7 29.47,-7.57 13.807,-4.24 10.2,-4 -4.366,-7.443 -8.334,-7.443 -19.043,-16.3 -19.3,-19.856 -15.125,-19.8 -4.718,-17.65 24.124,-17.777 39.606,-19.497 43.9,-19.6 44,-17.807
G1 on Bottom Layer "G1_L02_P031" (solid, pour order 31): 30.25,-5.75 14,-2.5 13.5,-2.5 13.5,-6 14.25,-6 29.75,-9.5 30.5,-9.5 30.5,-5.75
+12 on Bottom Layer "+12_L02_P041" (solid, pour order 41): -23.5,-16.3 -17.8,-11 -16.6,-12.4 -22.612,-17.755 -23.5,-16.4
R1 on Bottom Layer "R1_L02_P035" (solid, pour order 35): 24.25,-15.75 40,-17.5 40.75,-17.5 40.75,-21.25 39.75,-21.25 24.25,-19.5 23.25,-19.5 23.25,-15.75
R2 on Bottom Layer "R2_L02_P034" (solid, pour order 34): -1.5,-15.75 21.25,-15.75 21.25,-19.5 -1.5,-19.5
R3 on Bottom Layer "R3_L02_P033" (solid, pour order 33): -15.5,-21 -14.75,-21 -4.25,-19.5 -3.5,-19.5 -3.5,-15.75 -4.25,-15.75 -14.75,-17.5 -15.5,-17.5
G2 on Bottom Layer "G2_L02_P032" (solid, pour order 32): 11.25,-2.5 10.75,-2.5 -4.5,-5.75 -5.25,-5.75 -5.25,-9.25 -4.5,-9.25 10.75,-6 11.25,-6

## Other copper
Top Layer:

## Silkscreen, mask and mechanical layers (free items; w line width, h text height)
Top Overlay:
  drawing of 37 lines, arcs and shapes, not listed
  text "Roberto Garcia Torrico / 2024-2025" at -23.6,-19 h1.7 r43
Mechanical 1:
  the board outline again, w0.2